# Altium PCB 遥控.PCBDOC (part 1 of 2)
Units mm, origin at the board's own origin, x right, y up, seen from the top; angles counter-clockwise.
Board outline 70.36 x 87.5 mm, 2 copper layers (Top Layer, Bottom Layer); 32 components, 37 nets, 115 pads, 57 vias.
Unrouted connection lines stored in the file: 5.
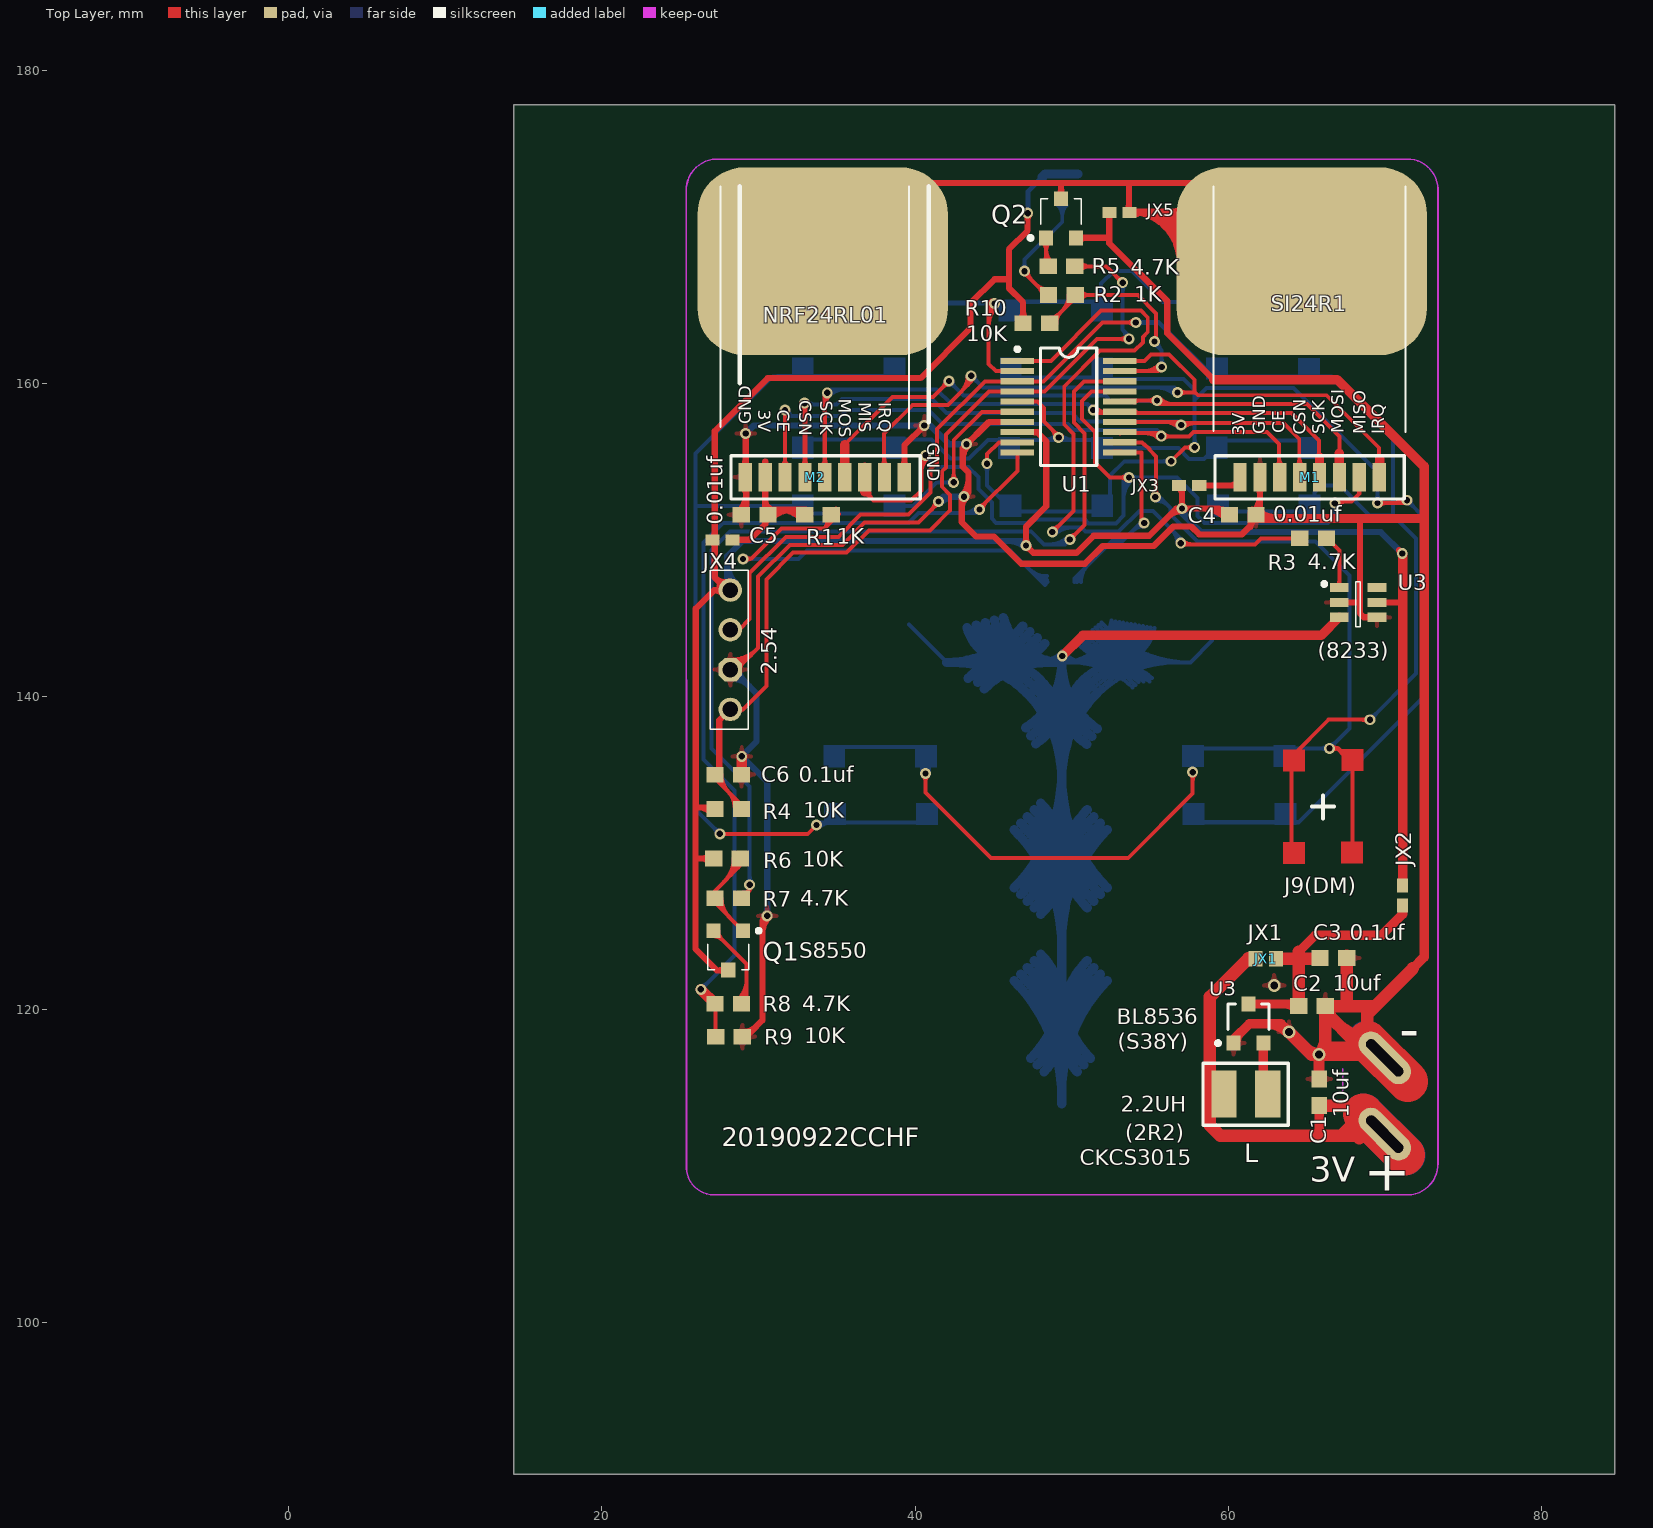
[diagram p0: Top Layer view]
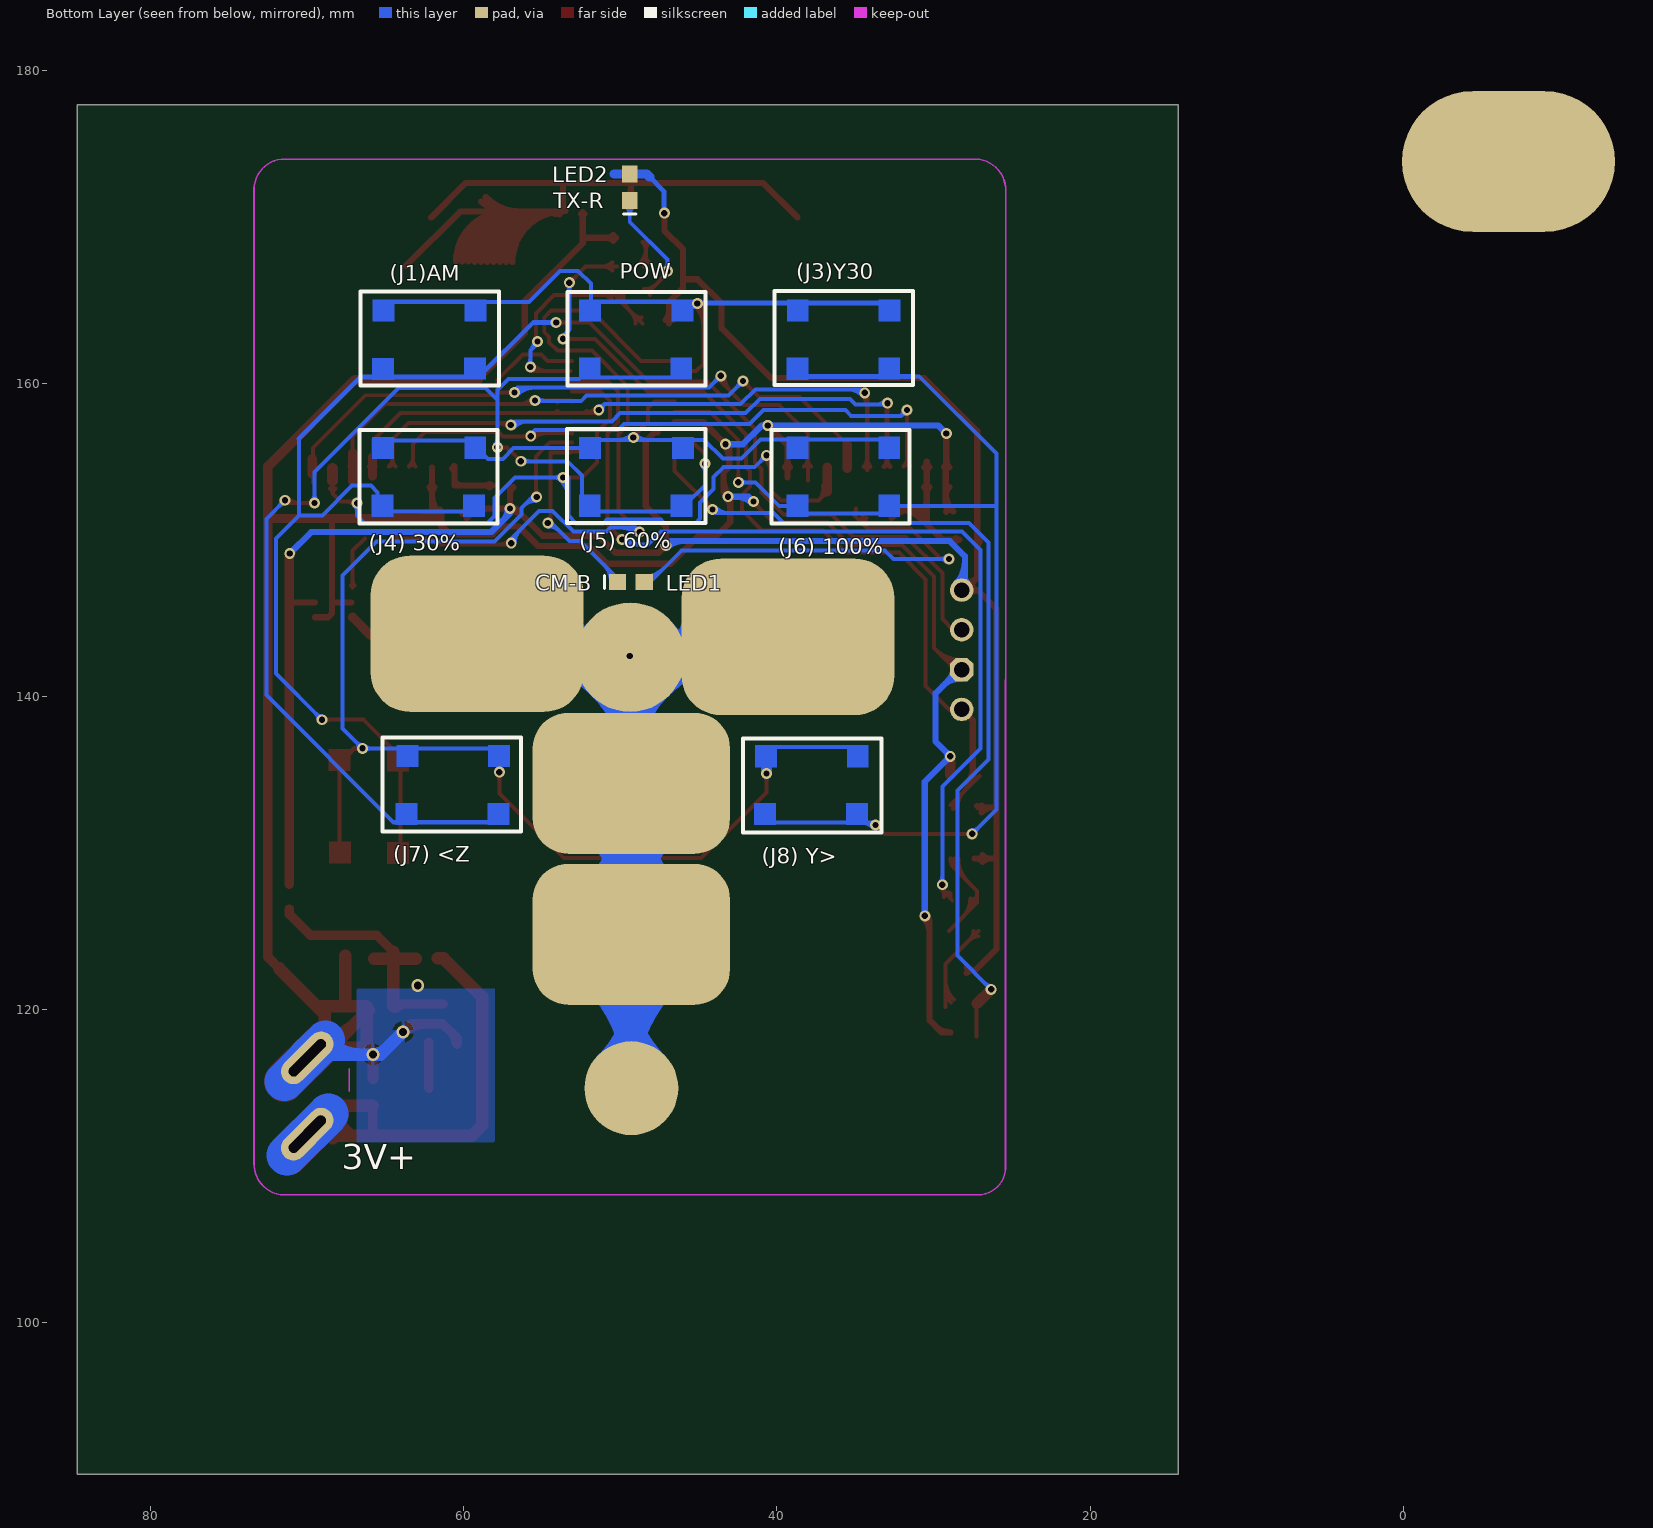
[diagram p1: Bottom Layer view, seen from below]

## Layer stack, top to bottom
Top Layer: signal copper 0.0356
Dielectric: dielectric 0.32, FR-4, Dk 4.8
Bottom Layer: signal copper 0.0356

## Board outline
19.304,90.297 84.709,90.297 84.709,177.8 14.351,177.8 14.351,90.297

## Design rules (kind name [scope] priority, off if disabled: settings)
Clearance [All] p1: gap=0.254
FabricationTestPointUsage TestPointUsage [All] p1: valid=0 allowmultiple=FALSE
FabricationTestpoint Testpoint [All] p1: side=3 testpointundercomponent=TRUE minsize=1.016 maxsize=2.54 preferedsize=1.524 minholesize=0 maxholesize=1.016 preferedholesize=0.813 testpointgrid=0.025 allowsidetop=TRUE allowsidebottom=TRUE usegrid=TRUE gridtolerance=0
PolygonConnect [All] p1: connectstyle=Relief reliefconductorwidth=0.254 reliefentries=4 polygonreliefangle="90 Angle"
RoutingVias [All] p1: holewidth=0.4 width=0.8 viastyle="Through Hole" minholewidth=0.4 minwidth=0.6 maxholewidth=1 maxwidth=1.5
SilkscreenOverComponentPads [All] p1: minsilkscreentomaskgap=0.254
SolderMaskExpansion [All] p1: expansion=0.102
Width Width_9 [InNet('3V3')] p1: maxlimit=1 minlimit=0.254 preferedwidth=0.6 toplayer_prefwidth=0.55 minimp=50.000000 maximp=50.000000 favimp=50.000000
Width Width_8 [InNet('3V+')] p2: maxlimit=3 minlimit=0.254 preferedwidth=0.8 toplayer_prefwidth=0.55 minimp=50.000000 maximp=50.000000 favimp=50.000000
Width Width_7 [InNet('L-3V')] p3: maxlimit=1 minlimit=0.254 preferedwidth=0.6 toplayer_prefwidth=0.55 minimp=50.000000 maximp=50.000000 favimp=50.000000
Width Width_6 [InNet('T-3V')] p4: maxlimit=1 minlimit=0.254 preferedwidth=0.6 toplayer_prefwidth=0.55 minimp=50.000000 maximp=50.000000 favimp=50.000000
Width Width_5 [InNet('3V')] p5: maxlimit=1 minlimit=0.254 preferedwidth=0.6 toplayer_prefwidth=0.39 minimp=50.000000 maximp=50.000000 favimp=50.000000
Width Width_4 [InNet('T-3V')] p6: maxlimit=1 minlimit=0.254 preferedwidth=0.6 toplayer_prefwidth=0.55 minimp=50.000000 maximp=50.000000 favimp=50.000000
Width Width_3 [InNet('D1-')] p7: maxlimit=1 minlimit=0.3 preferedwidth=0.8 toplayer_prefwidth=0.6 minimp=50.000000 maximp=50.000000 favimp=50.000000
Width Width_2 [InNet('GND')] p8: maxlimit=3 minlimit=0.254 preferedwidth=0.8 toplayer_prefwidth=0.39 minimp=50.000000 maximp=50.000000 favimp=50.000000
Width Width_1 [InNet('3V')] p9: maxlimit=1 minlimit=0.254 preferedwidth=0.6 toplayer_prefwidth=0.55 minimp=50.000000 maximp=50.000000 favimp=50.000000
Width [All] p10: maxlimit=2 minlimit=0.254 preferedwidth=2 bottomlayer_prefwidth=0.8 minimp=50.000000 maximp=50.000000 favimp=50.000000
25 further rules are at their usual default settings.

## Components (designator, comment, footprint, x,y, rotation, side; value= is the part's Value field where it differs from the comment)
2.54 "2.54HP" HDR1X4 28.2,139.167 r90 top (schematic designator SX)
(8233) "U3" SOT23-6_M 68.301,146 r0 top
C1 "10uf" CR1608-0603 65.811,114.706 r90 top
C2 "10uf" CR1608-0603 65.354,120.218 r180 top
C3 "0.1uf" CR1608-0603 66.726,123.292 r0 top
C4 "0.01uf" CR1608-0603 60.935,151.6 r180 top
C5 "0.01uf" CR1608-0603 29.75,151.6 r0 top
C6 "0.1uf" CR1608-0603 28.067,135 r0 top
JX1 "JX1" CR1005-0402#1 62.408,123.241 r0 top
JX2 "JX3" CR1005-0402#2 71.145,127.279 r270 top
JX3 "JX2" CR1005-0402#2 57.506,153.467 r0 top
JX4 "JX2" CR1005-0402#2 27.7,150 r0 top
JX5 "JX2" CR1005-0402#2 53.061,170.917 r180 top
L "2.2UH" L7 61.519,115.57 r180 top locked
LED1 "CM-B" CC1608-0603 49.327,147.3 r180 bottom
LED2 "TX-R" CC1608-0603 49.403,172.517 r90 bottom
M1 "SI24R1" MHDR1X8 69.65,154 r180 top locked
M2 "NRF24L01" MHDR1X8 38.049,154 r180 top locked
Q1 "S8550" SO-G3/C2.5 28.067,123.774 r180 top (schematic designator U5)
Q2 "S8550" SO-G3/C2.5 49.327,170.536 r0 top locked (schematic designator U5)
R1 "1K" CR1608-0603 33.8,151.6 r180 top
R2 "1K" CR1608-0603 49.378,165.633 r0 top
R3 "4.7K" CR1608-0603 65.43,150.089 r180 top
R4 "10K" CR1608-0603 28.067,132.8 r0 top
R5 "4.7K" CR1608-0603 49.352,167.462 r0 top
R6 "10K" CR1608-0603 27.991,129.642 r0 top
R7 "4.7K" CR1608-0603 28.067,127.102 r180 top
R8 "4.7K" CR1608-0603 28.067,120.371 r180 top
R9 "10K" CR1608-0603 28.118,118.262 r180 top
R10 "10K" CR1608-0603 47.752,163.83 r0 top
U1 "STM8L051F3P6" SSOP20 49.809,158.501 r270 top locked
U3 "BL8536" SO-G3/C2.5 61.3,119.1 r0 top

## Footprints (in the part's own frame and the unit in brackets; to place one, negate y for a bottom-side part, rotate by r counter-clockwise, add the part's x,y. Pads: shape width x height; smd on the part's side, far side on the other; paste and mask are expansions set on the pad)
CC1608-0603 [mm] "Chip Capacitor; Body 1.6 x 0.8 mm (LxW typ)"
  rect 1.1x1 smd: 1(-0.85,0) 2(0.85,0)
  silkscreen extent -1.7,-0.4 -1.7,0.4
CR1005-0402#1 [mm] "Chip Resistor; Body 1.1 x 0.5 mm (LxW typ)"
  rect 0.9x1 smd: 1(-0.65,0) 2(0.65,0)
CR1005-0402#2 [mm] "Chip Resistor; Body 1.1 x 0.5 mm (LxW typ)"
  rect 0.9x0.7 smd: 1(-0.65,0) 2(0.65,0)
CR1608-0603 [mm] "Chip Resistor; Body 1.6 x 0.8 mm (LxW typ)"
  rect 1.1x1 smd: 1(-0.85,0) 2(0.85,0)
HDR1X4 [mm]
  round 1.5 hole 1: 1(0,0) 3(5.08,0) 4(7.62,0)
  oct 1.5x1.5 hole 1: 2(2.54,0)
  silkscreen extent -1.27,-1.14 8.89,1.27
L7 [mm]
  rect 1.6x3 smd: 1(1.791,0.964) 2(-1.009,0.964)
  silkscreen extent -2.31,-1.01 3.12,2.96
MHDR1X8 [mm] "Connector; Header; 8 Position"
  rect 0.85x1.8 smd: 1(0,0) 2(1.27,0) 3(2.54,0) 4(3.81,0) 5(5.08,0) 6(6.35,0) 7(7.62,0) 8(8.89,0)
  silkscreen extent -1.6,-1.36 10.49,1.4
SO-G3/C2.5 [mm]
  rect 0.9x0.95 smd: 1(-0.95,-1.25) 2(0.95,-1.25) 3(0,1.25)
  silkscreen extent -2.08,-1.37 1.3,1.25
SOT23-6_M [mm]
  rect 1.2x0.59 smd: 1(-1.2,0.95) 2(-1.2,0) 3(-1.2,-0.95) 4(1.2,-0.95) 5(1.2,0) 6(1.2,0.95)
  silkscreen extent -2.29,-1.55 0.15,1.31
SSOP20 [mm] "SSOP, Plastic; 20 Leads; Body Width 5.3 mm; Pitch 0.65 mm"
  rect 0.39x2.15 smd: 1(-2.925,-3.275) 2(-2.275,-3.275) 3(-1.625,-3.275) 4(-0.975,-3.275) 5(-0.325,-3.275) 6(0.325,-3.275) 7(0.975,-3.275) 8(1.625,-3.275) 9(2.276,-3.275) 11(2.925,3.275) 13(1.625,3.275) 15(0.325,3.275) 16(-0.325,3.275) 17(-0.975,3.275) 18(-1.625,3.275) 19(-2.275,3.275) 20(-2.925,3.275)
  rect 0.395x2.15 smd: 10(2.925,-3.275) 12(2.276,3.275) 14(0.975,3.275)
  silkscreen extent -3.8,-3.4 3.75,1.8

## Part data
U1: library part ST6208CN6, "8-Bit ROM MCU with A/D Converter, Two Timers, Oscillator Safeguard and Safe Reset, 20-Pin SSOP, Industrial"

## Free pads (board coordinates)
  oval 13.6x9 smd far side: 0(-6.73,174.166)
  rrect50% 16x12 smd: 0(34.1,167.792) 0(64.703,167.792)
  rrect50% 13.6x10 smd far side: 0(39.3,143.8) 0(59.15,144)
  rect 0.85x1.8 smd: 0(39.319,154)
  round 6 smd far side: 0(49.3,114.97)
  rrect50% 12.6x9 smd far side: 0(49.3,124.8) 0(49.3,134.442)
  round 7 smd far side: 0(49.378,142.5)
  oval 4.1x1.6 hole 0.65 slot 3.1 at 135 deg rot 135: 1(70,112.038) 1(70,116.91)

## Via types
v1: diameter 0.7, hole 0.4, Top Layer to Bottom Layer, 54 vias
v2: diameter 0.82, hole 0.5, Top Layer to Bottom Layer, 3 vias

## Nets (pads, with @x,y where several pads share a name; then routed paths per layer and width w, separated by ;. In a path a pad name is that pad's centre, name@x,y a point inside that pad or via, vN(x,y) a via of type N, cw(c..) or ccw(c..) an arc to the next point about the centre after c; other vN are vias at no path point)
3.3V: 
3V: 2.54.4 (8233).5 C2.2 C3.1 C4.2 C5.2 JX1.2 JX2.1 JX2.2 JX3.1 JX3.2 JX4.1 JX4.2 LED2.2 M1.8 M2.7 Q1.3 R1.2 R4.1 R6.1 R10.1 U1.8 U3.3 | length 224.1
  Top Layer w0.36: v1(47.092,149.631) v1@47.092,149.962
  Top Layer w0.38: 25.984,134.321 25.984,123.85 27.333,122.502 Q1.3@27.739,122.502 ; 25.997,133.135 25.997,132.934 26.031,132.9 27.117,132.9 R4.1@27.217,133 ; 26.177,132.9 cw(c26.177,131.81) R4.1@26.948,132.581 ; 26.199,129.642 R6.1@27.381,129.642 ; 26.66,132.9 ccw(c26.66,133.307) R4.1@26.948,133.019 ; R6.1@26.872,129.422 ccw(c26.342,128.893) 26.342,129.642 ccw(c26.342,130.39) R6.1@26.872,129.861 ; R6.1@27.09,129.591 R6.1@27.141,129.642 ; 27.434,122.502 cw(c27.434,121.866) Q1.3@27.883,122.315 ; 27.445,122.502 ccw(c27.445,123.121) Q1.3@27.883,122.683
  Top Layer w0.39: JX4.1@27.04,149.89 cw(c26.647,149.497) 27.203,149.497 ; JX4.1@27.04,150.11 ccw(c26.647,150.503) 27.203,150.503 ; 27.394,147.393 cw(c26.788,146.787) 2.54.4@27.645,146.787 ; 2.54.4@27.517,147.058 2.54.4@27.789,146.787 ; 2.54.4@28,146.787 27.203,147.583 ; 2.54.4@28.079,147.328 cw(c27.873,148.253) 27.203,147.583 ; C5.2@30.59,151.66 cw(c31.211,151.039) 31.211,151.917 ; C5.2@30.67,152.07 30.822,151.917 R1.2@33.045,151.917 ; C5.2@30.866,151.384 cw(c32.153,150.097) 32.153,151.917 ; 31.397,151.917 cw(c31.397,150.097) R1.2@32.684,151.384 ; 32.339,151.917 cw(c32.339,151.039) R1.2@32.96,151.66 ; 45.085,166.649 43.536,165.1 43.536,163.5 40.361,160.325 30.582,160.325 27.203,156.947 27.203,147.583 ; 45.999,166.065 45.999,168.554 47.193,169.748 v1(47.193,170.866) ; v1@47.084,170.756 cw(c46.819,170.492) 47.193,170.492 cw(c47.567,170.492) v1@47.303,170.756 ; JX3.1@56.846,153.357 cw(c56.357,152.869) 57.048,152.869 ; v1@56.935,151.888 ccw(c56.693,151.663) 56.693,151.994 ; v1@56.935,152.099 cw(c56.693,152.324) 56.693,151.994 ; v1@56.939,152.103 ccw(c56.674,152.368) 57.048,152.368 ccw(c57.423,152.368) 57.158,152.103 ccw(c57.423,152.368) 57.423,151.994 ccw(c57.423,151.619) v1@57.158,151.884 ; v1@57.048,151.968 JX3.1@57.048,153.441 ; JX3.2@58.156,153.467 60.604,153.467 60.604,154.406 M1.8@60.61,154.411 ; 58.348,151.994 cw(c58.348,149.913) C4.2@59.819,151.384 ; JX3.2@58.365,153.357 cw(c58.63,153.093) 58.63,153.467 cw(c58.63,153.841) JX3.2@58.365,153.576 ; 59.29,151.994 cw(c59.29,150.855) C4.2@60.095,151.66 ; C4.2@59.729,151.663 59.399,151.994 ; C4.2@59.923,151.884 cw(c59.745,152.34) 59.399,151.994 ; 60.064,153.467 ccw(c60.064,154.221) M1.8@60.597,153.688 ; M1.8@60.61,154.711 M1.8@60.61,154.411 ; M1.8@60.76,154.561 M1.8@60.61,154.411 ; 56.693,151.994 59.399,151.994
  Top Layer w0.4: 25.997,133.135 25.997,145.606 27.178,146.787 ; 2.54.4@27.741,146.484 ccw(c27.178,146.112) 27.178,146.787 ; 2.54.4@27.741,147.09 cw(c27.178,147.461) 27.178,146.787 ; 2.54.4@27.789,146.787 27.178,146.787 ; JX4.2@28.35,150 29.426,150 30.429,151.003 30.429,155 ; JX4.2@28.556,149.894 cw(c28.812,149.638) 28.812,150 cw(c28.812,150.362) JX4.2@28.556,150.106 ; M2.7@30.27,153.366 cw(c29.886,152.982) 30.429,152.982 cw(c30.972,152.982) M2.7@30.588,153.366 ; M2.7@30.274,154.638 ccw(c29.929,155) 30.429,155 ; 30.429,150.991 cw(c30.78,150.991) C5.2@30.656,151.319 ; 30.429,152.616 ccw(c31.566,152.616) C5.2@30.762,151.812 ; M2.7@30.584,154.638 cw(c30.929,155) 30.429,155 ; 45.085,166.649 45.999,166.649 ; 45.999,166.065 46.902,165.163 R10.1@46.902,163.83 ; R10.1@46.69,164.042 ccw(c46.178,164.554) 46.902,164.554 ccw(c47.626,164.554) R10.1@47.114,164.042 ; v1@46.986,149.737 ccw(c46.729,149.994) 47.092,149.994 ccw(c47.454,149.994) v1@47.198,149.737 ; v1@47.092,149.481 cw(c47.092,149.119) 47.348,149.375 cw(c47.604,149.631) v1@47.242,149.631 ; v1(47.092,149.631) 47.549,149.174 50.317,149.174 51.403,150.26 54.959,150.26 56.693,151.994 ; v1@47.092,149.962 47.092,150.851 48.387,152.146 48.387,156.286 47.799,156.874 47.638,156.874 ; 56.185,151.486 cw(c57.048,150.623) v1@57.048,151.844 ; 69.501,146 70.917,146 ; v1@70.917,149.327 v1@71.145,149.098
  Top Layer w0.6: U3.3@61.3,120.35 C2.2@64.469,120.35 ; 63.653,120.35 cw(c63.653,119.417) C2.2@64.313,120.077 ; 64.504,123.686 65.557,124.739 69.799,124.739 71.145,126.086 JX2.2@71.145,126.416 ; JX2.1@71.145,127.991 v1@71.145,149.098
  Top Layer w0.8: JX1.2@63.058,123.241 C3.1@65.723,123.241 ; C2.2@64.504,120.218 64.504,123.686
  Bottom Layer w0.3: v1@47.052,171.007 ccw(c46.649,171.41) 47.219,171.41 ; v1@47.219,170.866 47.219,172.263 48.133,173.177 ; 47.219,171.287 ccw(c47.615,171.287) v1@47.335,171.007
  Bottom Layer w0.38: 2.54.4@27.711,146.787 2.54.4@28,147.075
  Bottom Layer w0.39: 2.54.4@27.808,147.179 ccw(c27.343,147.644) 28,147.644 ; 2.54.4@28,147.075 28,148.955 28.956,149.911 46.812,149.911 v1(47.092,149.631) ; 28,147.668 ccw(c29.081,147.668) 2.54.4@28.317,146.903 ; 28,148.609 ccw(c30.023,148.609) 2.54.4@28.592,147.179 ; 46.043,149.911 cw(c46.043,148.583) v1@46.982,149.522
  Bottom Layer w0.4: v1(57.048,151.994) 57.048,151.7 57.687,151.062 58.25,150.498 58.544,150.498 58.547,150.495 69.748,150.495 v1(71.12,149.123) ; v1@57.198,151.994 ccw(c58.27,151.994) 57.512,151.236 ; v1@70.97,149.123 ccw(c70.608,149.123) 70.864,149.379 ccw(c71.12,149.636) v1@71.12,149.273
  Bottom Layer w0.6: 48.133,173.177 48.323,173.367 50.394,173.367
3V+: C1.1 JX1.1 L.1 pad.1@70,112.038 | length 55.3
  Top Layer w0.254: 66.624,111.941 66.65,111.967
  Top Layer w0.6: 65.811,112.017 C1.1@65.811,113.856 ; pad.1@68.631,113.335 pad.1@69.571,112.395
  Top Layer w0.8: JX1.1@61.671,123.266 61.29,123.266 58.826,120.802 58.826,112.598 59.483,111.941 66.624,111.941 67.237,111.941 ; C1.1@65.811,113.856 68.109,113.856 68.378,113.587 ; 68.31,113.656 ccw(c69.116,114.462) pad.1@69.116,113.322 ; 68.326,111.941 ccw(c68.326,113.169) pad.1@69.498,112.802 ; 68.378,111.77 cw(c69.13,111.77) pad.1@69.121,112.522 ; 68.378,112.58 cw(c69.12,112.58) pad.1@69.111,113.322 ; pad.1@68.631,113.335 pad.1@68.378,113.082 ; pad.1@68.734,113.041 cw(c67.237,113.51) 67.237,111.941 ; pad.1@69.052,112.527 ccw(c68.716,110.462) 67.237,111.941 ; pad.1@69.089,113.321 cw(c69.027,114.235) 68.378,113.587 ; pad.1@69.415,111.941 ccw(c69.415,112.828) pad.1@70.261,112.563 ; pad.1@69.571,112.395 pad.1@69.213,112.038 ; 67.237,111.941 69.903,111.941 pad.1@70,112.038 ; 67.237,111.941 pad.1@68.378,113.082 ; pad.1@68.378,113.082 68.378,112.038 pad.1@69.213,112.038 ; pad.1@68.378,113.082 68.378,113.587 ; pad.1@69.213,112.038 69.178,112.002 pad.1@70,112.038 ; pad.1@69.213,112.038 69.928,112.038 pad.1@70,112.038 ; 68.484,113.481 cw(c67.925,112.922) 68.716,112.922 ccw(c67.925,112.922) 68.484,113.481
  Top Layer w2.6: pad.1@68.631,113.335 pad.1@71.26,110.706
  Bottom Layer w2.6: pad.1@68.658,113.333 pad.1@71.298,110.693
3V-: Q1.2 R8.1 | length 9.4
  Top Layer w0.254: Q1.2@27.117,124.676 cw(c27.117,123.836) 27.711,124.43 ; Q1.2@27.117,125.024 29.235,122.906 R8.1@29.235,120.142 ; Q1.2@27.44,124.999 ccw(c28.159,124.999) 27.651,124.49 ; R8.1@28.703,120.634 ccw(c27.418,121.919) 29.235,121.919 ; R8.1@28.883,120.455 ccw(c28.032,121.306) 29.235,121.306
AHLB: 
BAT-KZ: R7.1 U1.18 | length 66.2
  Top Layer w0.254: R7.1@28.804,126.975 29.439,127.61 ; R7.1@28.917,127.102 R7.1@28.917,127.393 ; R7.1@29.021,127.471 ccw(c29.091,127.957) 29.439,127.61 ; R7.1@29.328,127.197 cw(c29.741,127.307) 29.439,127.61 ; v1@29.341,127.764 cw(c29.267,127.61) 29.439,127.61 ; v1(29.439,127.965) 29.439,127.61 ; v1@29.536,127.764 ccw(c29.611,127.61) 29.439,127.61 ; v1(49.886,150.012) 50.825,150.952 50.825,156.794 50.14,157.48 50.14,159.487 50.779,160.126 U1.18@53.217,160.126 ; v1@49.886,150.235 ccw(c49.886,150.774) 50.266,150.393 ccw(c50.647,150.012) v1@50.109,150.012
  Bottom Layer w0.254: v1@29.281,128.123 ccw(c28.9,128.504) 29.439,128.504 ccw(c29.977,128.504) v1@29.596,128.123 ; v1(29.439,127.965) 29.439,134.239 27,136.677 27,149.352 28.169,150.52 47.422,150.52 48.235,149.708 49.581,149.708 v1(49.886,150.012) ; 48.611,149.708 ccw(c48.611,151.287) v1@49.728,150.17 ; 49.225,149.708 ccw(c49.225,150.673) v1@49.908,149.99
BAT_ADC: R8.2 R9.2 U1.10 | length 60.1
  Top Layer w0.254: R9.2@27.268,118.262 R8.2@27.268,120.382 ; v1@44.094,151.968 46.534,154.408 U1.10@46.534,155.576 ; v1@44.12,152.166 ccw(c44.12,152.582) 44.414,152.288 ; v1@44.343,151.943 cw(c45.004,151.943) 44.536,152.41
  Top Layer w0.7: v1(26.314,121.285) R8.2@27.217,120.382
  Bottom Layer w0.254: v1(26.314,121.285) 28.473,123.444 28.473,133.977 26.492,135.958 26.492,149.835 27.737,151.079 39.573,151.079 40.208,151.714 43.891,151.714 v1(44.12,151.943) ; v1@26.314,121.508 ccw(c26.314,122.046) 26.695,121.666 ccw(c27.076,121.285) v1@26.537,121.285 ; 43.03,151.714 ccw(c43.03,153.033) v1@43.962,152.1 ; 43.643,151.714 ccw(c43.643,152.42) v1@44.142,151.921
CE: M1.6 M2.6 U1.13 | length 47.7
  Top Layer w0.254: M2.6@31.488,154.686 ccw(c30.98,155.194) 31.699,155.194 ccw(c32.419,155.194) M2.6@31.91,154.686 ; M2.6@31.546,154.731 ccw(c31.386,155) 31.699,155 ; v1(31.699,158.293) 31.699,155 ; M2.6@31.852,154.731 cw(c32.013,155) 31.699,155 ; U1.13@53.081,156.804 53.096,156.82 55.524,156.82 55.753,156.591 57.513,156.591 57.798,156.876 62.478,156.876 63.246,156.108 63.246,154.965 ; U1.13@54.012,156.924 ccw(c54.265,157.176) 54.265,156.82 ; 54.699,156.82 cw(c54.699,155.587) v1@55.57,156.459 ; 55.312,156.82 cw(c55.312,156.201) v1@55.75,156.638 ; v1@55.885,156.459 cw(c56.205,156.139) 56.205,156.591 ; v1@55.885,156.774 ccw(c56.327,157.216) 56.327,156.591 ; M1.6@63.089,154.686 ccw(c62.711,155.064) 63.246,155.064 ; M1.6@63.12,154.713 ccw(c62.929,154.965) 63.246,154.965 ; 63.246,155.325 ccw(c64.15,155.325) M1.6@63.511,154.686 ; M1.6@63.395,154.757 cw(c63.466,154.965) 63.246,154.965 ; M1.6@63.5,154.711 63.246,154.965
  Bottom Layer w0.254: v1@31.699,158.07 cw(c31.699,157.531) 32.08,157.912 ; v1(31.699,158.293) 32.08,157.912 ; v1@31.922,158.293 ccw(c32.461,158.293) 32.08,157.912 ; v1@55.519,156.695 ccw(c55.23,156.804) 55.448,157.023 ; v1@55.728,156.743 55.448,157.023 ; 32.08,157.912 35.255,157.912 35.636,158.293 40.869,158.293 41.758,157.404 49.784,157.404 50.165,157.023 55.448,157.023
  other v1: 55.728,156.616
CMOUT: (8233).1 R3.1 R3.2 U1.1 | length 55
  Top Layer w0.254: U1.1@46.534,161.426 48.675,161.426 51.892,164.643 54.432,164.643 54.864,164.211 54.864,163.264 54.565,162.964 54.565,162.616 54.026,162.077 51.816,162.077 49.53,159.791 49.53,157.353 50.114,156.769 50.114,151.841 v1(48.768,150.495) ; v1@48.768,150.718 ccw(c48.768,151.256) 49.149,150.876 ccw(c49.529,150.495) v1@48.991,150.495 ; v1@56.972,149.911 57.175,149.708 61.722,149.708 62.103,150.089 R3.2@64.58,150.089 ; v1@57.13,149.626 cw(c57.327,149.429) 57.327,149.708 ; v1@57.13,149.941 ccw(c57.695,150.506) 57.695,149.708 ; R3.2@64.248,150.277 R3.2@64.436,150.089 ; R3.1@66.319,150.089 67.101,149.307 67.101,146.95 ; 66.982,147.069 ccw(c66.695,147.356) 67.101,147.356 ccw(c67.506,147.356) 67.219,147.069
  Bottom Layer w0.254: v1@48.746,150.517 cw(c49.368,149.895) 49.368,150.774 ; v1(48.768,150.495) 49.047,150.774 50.622,150.774 50.876,150.52 53.01,150.52 54.331,151.841 55.194,151.841 56.963,150.073 v1@56.963,149.774 ; v1@48.926,150.337 cw(c49.981,149.282) 49.981,150.774 ; 56.394,150.641 cw(c55.536,149.784) v1@56.749,149.784 ; 56.828,150.208 cw(c56.404,149.784) v1@57.003,149.784
  other v1: 56.972,149.784
CSN: M1.5 M2.5 U1.14 | length 51.1
  Top Layer w0.254: U1.14@53.084,157.526 56.799,157.526 v1(56.998,157.328) ; 55.981,157.526 cw(c55.981,156.311) v1@56.84,157.17 ; 56.594,157.526 cw(c56.594,156.924) v1@57.02,157.35 ; v1@56.998,157.452 63.528,157.452 64.541,156.439 64.541,154.864 64.694,154.711 64.57,155 ; v1@57.155,157.17 cw(c57.836,156.489) 57.836,157.452 ; M1.5@64.359,154.686 ccw(c63.92,155.125) 64.541,155.125 ; 64.541,155.263 ccw(c65.358,155.263) M1.5@64.781,154.686
  Top Layer w0.3: M2.5@32.775,154.669 ccw(c32.305,155.139) 32.969,155.139 ccw(c33.633,155.139) M2.5@33.164,154.669 ; v1@32.802,158.583 cw(c32.4,158.18) 32.969,158.18 ; M2.5@32.813,154.701 ccw(c32.606,155) 32.969,155 ; v1(32.944,158.725) 32.969,158.699 32.969,155 ; 32.969,158.303 cw(c33.365,158.303) v1@33.085,158.583 ; M2.5@33.126,154.701 cw(c33.333,155) 32.969,155
  Bottom Layer w0.254: v1(32.944,158.725) 32.868,158.648 34.976,158.648 35.331,159.004 41.097,159.004 42.012,158.09 50.013,158.09 50.546,157.556 56.769,157.556 v1(56.998,157.328) ; v1@33.101,158.567 cw(c33.298,158.37) 33.298,158.648 ; v1@33.101,158.882 ccw(c33.666,159.447) 33.666,158.648 ; 55.907,157.556 cw(c55.907,156.237) v1@56.84,157.17 ; 56.521,157.556 cw(c56.521,156.851) v1@57.02,157.35
GND: 2.54.2 (8233).2 (8233).4 C1.2 C2.1 C3.2 C4.1 C5.1 C6.2 JX5.2 M1.7 M2.8 pad.0@39.319,154 pad.1@70,116.91 Q2.2 R9.1 U1.7 U3.1 | length 297.9
  Top Layer w0.254: 2.54.2@28.2,141.822 ccw(c28.2,143.066) 29.08,142.186 ; 2.54.2@28.2,142.076 ccw(c28.2,143.933) 29.513,142.62 ; 2.54.2@28.2,142.33 ccw(c28.2,144.8) 29.947,143.053 ; 2.54.2@28.6,141.707 29.972,143.078 29.972,147.65 32.004,149.682 35.357,149.682 36.779,151.105 40.234,151.105 v1@41.377,152.248 ; 2.54.2@28.823,141.707 cw(c29.36,141.707) 28.98,142.087 ; 41.069,151.94 ccw(c40.558,152.451) v1@41.281,152.451 ; 41.253,152.124 cw(c41.504,151.873) v1@41.504,152.228
  Top Layer w0.4: 2.54.2@27.711,141.707 2.54.2@28.6,141.707 ; C5.1@28.738,151.812 ccw(c27.598,152.952) 29.21,152.952 ; C5.1@28.9,151.9 29.21,152.21 ; R9.1@28.917,118.528 29.476,118.528 30.251,119.304 30.251,125.679 v1(30.556,125.984) ; C5.1@28.924,151.899 ccw(c28.898,152.21) 29.21,152.21 ; M2.8@29,153.366 cw(c28.493,152.859) 29.21,152.859 ; M2.8@29,154.634 ccw(c28.555,155.08) 29.185,155.08 ; M2.8@29.011,154.645 ccw(c28.68,155.025) 29.185,155.025 ; R9.1@29.018,118.562 ccw(c29.018,119.751) 29.858,118.91 ; v1@29.079,156.688 cw(c28.822,156.432) 29.185,156.432 cw(c29.547,156.432) v1@29.291,156.688 ; 29.159,155 29.185,155.025 ; v1(29.185,156.794) 29.185,155.025 ; C5.1@29.185,151.786 cw(c29.436,151.984) 29.21,152.21 ; M2.8@29.21,154.508 29.21,152.21 ; 30.251,124.886 cw(c31.654,124.886) v1@30.662,125.878 ; v1@30.406,125.984 cw(c30.044,125.984) 30.3,125.728 cw(c30.556,125.472) v1@30.556,125.834 ; pad.0@39.16,154.634 ccw(c38.776,155.018) 39.319,155.018 ccw(c39.862,155.018) pad.0@39.478,154.634 ; pad.0@39.319,153.975 39.319,156.032 v1@40.615,157.328 ; v1@40.439,157.302 cw(c40.077,157.302) 40.333,157.046 cw(c40.589,156.79) v1@40.589,157.152 ; 42.977,152.026 cw(c43.859,152.026) v1@43.235,152.65 ; v1@43.023,152.862 ccw(c42.093,153.792) 43.409,153.792 ; 43.053,155.194 cw(c44.196,155.194) v1@43.388,156.002 ; v1@43.129,152.906 ccw(c43.129,153.268) 43.385,153.012 ccw(c43.641,152.756) v1@43.279,152.756 ; v1@43.282,156.258 ccw(c43.282,156.682) 43.581,156.382 ; U1.7@46.534,157.526 44.725,157.526 43.053,155.854 43.053,154.661 43.409,154.305 43.409,153.035 42.977,152.603 42.977,151.13 43.891,150.216 45.034,150.216 46.787,148.463 50.851,148.463 51.994,149.606 55.245,149.606 56.49,150.851 57.633,150.851 58.141,150.343 60.884,150.343 61.429,150.888 C4.1@61.429,151.663 ; Q2.2@50.277,169.286 52.405,169.286 52.411,169.291 ; Q2.2@50.454,169.109 cw(c50.88,168.682) 50.88,169.286 cw(c50.88,169.889) Q2.2@50.454,169.462 ; JX5.2@52.305,170.811 cw(c52.048,170.554) 52.411,170.554 cw(c52.773,170.554) JX5.2@52.517,170.811 ; JX5.2@52.411,170.917 52.411,169.291 ; 59.08,160.223 56.109,163.195 56.109,165.252 52.411,168.95 52.411,169.291 ; 61.429,150.825 cw(c61.928,150.825) C4.1@61.807,151.309 ; C4.1@61.519,151.917 C4.1@61.849,151.587 ; C4.1@61.62,151.359 62.03,151.768 M1.7@62.03,154.61 ; C4.1@61.622,151.812 ccw(c60.639,152.796) 62.03,152.796 ; M1.7@61.871,153.366 cw(c61.487,152.982) 62.03,152.982 cw(c62.573,152.982) M1.7@62.189,153.366 ; 67.189,145.999 68.351,145.999 ; 68.415,151.359 68.415,145.304 68.669,145.05 69.501,145.05 ; pad.1@69.127,117.766 69.545,117.348 pad.1@70,116.91 ; 29.185,154.957 ccw(c29.641,154.957) 29.318,154.634 cw(c29.641,154.957) 29.185,154.957
  Top Layer w0.6: 59.08,160.223 66.98,160.223 72.517,154.686 72.517,123.342 71.806,122.631 ; U3.1@60.411,117.789 60.411,118.145 61.341,119.075 63.398,119.075 v2@63.856,118.618 ; U3.1@60.5,117.875 cw(c61.367,117.875) 60.754,118.488 ; C4.1@61.62,151.359 72.517,151.359 ; C4.1@61.976,151.741 ccw(c62.9,152.666) 62.9,151.359 ; 62.389,119.075 cw(c62.389,117.075) v2@63.803,118.489
  Top Layer w0.7: C6.2@28.931,135 v1(28.931,136.169) ; C1.2@65.811,115.556 v2(65.811,117.119)
  Top Layer w0.8: v2(63.881,118.567) 65.329,117.119 v2(65.811,117.119) ; 64.97,117.478 ccw(c65.811,118.319) v2@65.811,117.129 ; v2@65.804,117.126 ccw(c64.839,118.092) 66.204,118.092 ; C2.1@66.091,119.939 C2.1@66.204,119.825 ; C2.1@66.354,120.218 ccw(c67.665,120.218) 66.738,119.292 ; 66.522,117.119 ccw(c66.522,120.388) 68.833,118.077 cw(c67.591,119.319) 67.591,117.562 ; 66.524,117.562 68.897,117.562 68.455,117.119 ; 66.93,119.099 ccw(c69.116,121.285) pad.1@69.116,118.194 ; 67.576,120.269 C3.2@67.576,123.444 ; 68.296,117.734 ccw(c69.116,118.554) 69.116,117.394 ccw(c69.116,116.46) 68.456,117.12 ; 68.453,117.119 ccw(c68.453,118.457) pad.1@69.399,117.511 ; pad.1@68.716,117.781 cw(c67.822,117.752) 68.455,117.119 ; pad.1@68.796,118.033 cw(c68.263,118.43) 68.263,117.766 ; pad.1@68.823,117.522 ccw(c68.263,117.004) 68.263,117.766 ; pad.1@68.897,117.97 68.897,119.723 71.806,122.631 ; 68.897,119.287 ccw(c70.61,119.287) pad.1@69.399,118.077 ; pad.1@69.127,117.766 69.102,117.766 68.263,117.766 ; 69.336,120.218 C2.1@66.204,120.218 C2.1@66.204,119.825 ; v2(65.811,117.119) 66.204,117.512 C2.1@66.204,119.825 ; v2(65.811,117.119) 68.455,117.119 ; C2.1@66.204,119.825 68.263,117.766
  Top Layer w2.6: pad.1@68.897,117.97 69.102,117.766 71.476,115.392
  Bottom Layer w0.4: 2.54.2@27.991,141.707 28.372,141.707 29.87,140.208 29.87,137.109 v1(28.931,136.169) 30.556,134.544 v1(30.556,125.984) ; 2.54.2@28.2,141.157 cw(c28.2,139.414) 29.432,140.646 ; 2.54.2@28.75,141.707 ccw(c29.663,141.707) 29.018,141.061 ; v1@28.931,136.019 cw(c28.931,135.657) 29.187,135.913 cw(c29.443,136.169) 29.081,136.169 cw(c29.443,136.169) 29.187,136.425 cw(c28.931,136.682) v1@28.931,136.319 ; v1(29.185,156.794) 29.693,157.302 v1(40.589,157.302) 40.979,157.302 42.173,156.108 v1(43.282,156.108) ; v1@29.185,156.944 ccw(c29.185,157.306) 29.441,157.05 ccw(c29.697,156.794) v1@29.335,156.794 ; v1@30.45,126.09 ccw(c30.194,126.346) 30.556,126.346 ccw(c30.918,126.346) v1@30.662,126.09 ; v1@40.483,157.196 ccw(c40.227,156.94) 40.227,157.302 ccw(c40.227,157.664) v1@40.483,157.408 ; v1@40.695,157.196 cw(c40.951,156.94) 40.951,157.302 cw(c40.951,157.664) v1@40.695,157.408 ; v1@41.504,152.324 v1(41.504,152.451) 41.808,152.756 v1(43.129,152.756) ; v1@41.61,152.345 cw(c42.602,151.353) 42.602,152.756 ; v1@43.023,152.65 ccw(c42.767,152.393) 42.767,152.756 ccw(c42.767,153.118) v1@43.023,152.862 ; v1@43.176,156.002 ccw(c42.919,155.746) 42.919,156.108 ccw(c42.919,156.471) v1@43.176,156.214 ; 68.683,116.994 68.683,117.119 68.683,118.21 pad.1@70,116.91
  Bottom Layer w0.8: v2(63.881,118.567) 65.329,117.119 v2(65.811,117.119) 68.683,117.119 69.748,117.119 69.791,117.119 pad.1@70,116.91 ; 64.97,117.478 ccw(c65.811,118.319) v2@65.811,117.129 ; 66.522,117.119 ccw(c66.522,120.388) pad.1@68.833,118.077 ; 68.453,117.119 ccw(c68.453,118.457) pad.1@69.399,117.511
  Bottom Layer w2.5: pad.1@70,116.91 68.836,118.032 69.748,117.119 71.476,115.392
  other v2: 62.941,121.539
GND2: JX5.1 pad.0@34.1,167.792 pad.0@64.703,167.792 Q2.3 | length 97
  Top Layer w0.4: pad.0@38.684,170.586 40.894,172.796 59.868,172.796 pad.0@62.078,170.586 ; Q2.3@49.15,171.987 ccw(c48.723,172.414) 49.327,172.414 ccw(c49.93,172.414) Q2.3@49.504,171.987 ; Q2.3@49.327,171.626 49.327,172.72 ; JX5.1@53.505,171.023 ccw(c53.13,171.398) 53.66,171.398 ; 53.66,172.796 JX5.1@53.66,170.967 ; JX5.1@53.886,170.787 cw(c54.084,170.443) 54.187,170.826 ; JX5.1@53.893,170.791 cw(c54.282,170.203) 54.423,170.894 ; JX5.1@53.917,170.811 cw(c54.295,170.432) 54.295,170.967 ; JX5.1@54.063,170.967 cw(c54.063,167.727) pad.0@57.303,167.752 ; 54.466,170.967 cw(c54.466,167.73) pad.0@57.703,167.755 ; 54.869,170.967 cw(c54.869,167.733) pad.0@58.103,167.758 ; 55.272,170.967 cw(c55.272,167.736) pad.0@58.503,167.761 ; 55.675,170.967 cw(c55.675,167.739) pad.0@58.903,167.764 ; 56.078,170.967 cw(c56.078,167.742) pad.0@59.303,167.767 ; 56.366,170.967 ccw(c56.366,174.13) pad.0@58.602,171.894 ; 56.481,170.967 cw(c56.481,167.745) pad.0@59.703,167.77 ; pad.0@56.884,170.967 cw(c56.884,167.749) pad.0@60.103,167.773 ; pad.0@56.903,167.749 ccw(c53.66,167.724) JX5.1@53.66,170.967 ; pad.0@57.287,170.967 cw(c57.287,167.752) pad.0@60.503,167.776 ; pad.0@57.331,170.967 ccw(c57.331,173.164) pad.0@58.885,171.611 ; pad.0@63.703,167.5 60.236,170.967 JX5.1@53.66,170.967
HWKZ: 
HWPOW: 
IRQ: M1.1 M2.1 U1.20 | length 56.9
  Top Layer w0.254: M2.1@37.838,154.686 ccw(c37.391,155.133) 38.024,155.133 ; M2.1@38.024,153.772 38.024,156.794 39.853,158.623 42.113,158.623 43.586,160.096 ; 38.024,155.256 ccw(c38.83,155.256) M2.1@38.26,154.686 ; 42.936,159.446 ccw(c41.905,160.477) v1@43.363,160.477 ; 43.37,159.88 ccw(c42.772,160.477) v1@43.617,160.477 ; v1@43.477,160.283 cw(c43.372,160.096) 43.586,160.096 ; v1(43.586,160.477) 43.586,160.096 ; v1@43.696,160.283 ccw(c43.8,160.096) 43.586,160.096 ; U1.20@53.084,161.426 54.644,161.426 55.067,161.849 56.236,161.849 57.861,160.223 57.861,159.436 58.064,159.233 ; v1(56.769,159.41) 57.887,159.41 58.064,159.233 ; v1@56.927,159.253 cw(c57.307,158.872) 57.307,159.41 cw(c57.307,159.949) v1@56.927,159.568 ; M1.1@69.439,154.686 ccw(c68.938,155.187) 69.647,155.187 ; M1.1@69.469,154.864 M1.1@69.621,154.711 ; M1.1@69.647,153.67 69.647,155.88 66.294,159.233 58.064,159.233 ; 69.647,155.202 ccw(c70.377,155.202) M1.1@69.861,154.686
  Top Layer w0.6: M1.1@69.672,154.203 69.672,155.169
  Bottom Layer w0.254: v1@43.586,160.254 cw(c43.586,159.716) 43.967,160.097 cw(c44.348,160.477) v1@43.809,160.477 ; v1(43.586,160.477) 44.348,159.715 56.566,159.715 56.566,159.385 v1@56.769,159.588 ; 55.495,159.715 cw(c55.495,158.136) v1@56.611,159.253 ; 56.108,159.715 cw(c56.108,158.749) v1@56.791,159.432
JA: U1.2 | length 50.4
  Top Layer w0.254: 44.704,163.642 cw(c46.543,163.642) v1@45.243,164.942 ; 44.704,164.255 cw(c45.93,164.255) v1@45.063,165.122 ; 44.704,164.868 cw(c45.317,164.868) v1@44.883,165.302 ; v1@44.956,164.918 ccw(c44.843,164.758) 44.704,164.897 ; v1(45.085,165.1) 44.996,165.189 44.704,164.897 ; U1.2@46.534,160.776 45.167,160.776 44.704,161.239 44.704,164.897
  Bottom Layer w0.254: 51.968,165.202 51.968,164.516 51.918,164.567 51.892,164.567 ; 59.182,164.643 59.182,165.202 55.829,165.202 53.848,167.183 52.705,167.183 51.892,166.37 51.892,165.202 51.892,164.567 ; 51.892,164.567 51.816,164.49 51.74,164.567 51.892,164.567
  Bottom Layer w0.3: 33.146,165.125 45.466,165.125 ; 44.541,165.125 cw(c44.541,164.556) v1@44.944,164.959 ; 44.663,165.125 ccw(c44.663,165.522) v1@44.944,165.241 ; v1@45.073,165.199 cw(c45.143,164.611) 45.562,165.03 ; v1@45.108,164.901 cw(c45.235,163.827) 45.999,164.592 45.466,165.125 ; v1@45.236,165.231 ccw(c45.466,165.428) 45.466,165.125 ; v1@45.26,165.004 cw(c45.466,164.891) 45.466,165.125 ; 45.955,164.871 46.285,165.202 51.892,165.202 ; 59.182,165.202 64.541,165.202 65.202,164.541
  Bottom Layer w0.4: 32.536,164.516 33.146,165.125
JB: U1.5 | length 41.1
  Top Layer w0.254: U1.5@46.534,158.826 47.828,158.826 48.235,158.42 48.235,157.556 49.174,156.616 v1@49.378,156.616 ; 48.74,157.051 cw(c48.229,156.54) v1@48.951,156.54 ; 48.924,156.867 ccw(c49.174,157.118) v1@49.174,156.763
  Bottom Layer w0.254: 32.588,156.261 32.741,156.413 41.046,156.413 42.266,155.194 43.459,155.194 44.653,156.388 51.74,156.388 52.273,155.854 56.82,155.854 57.5,155.174 58.451,155.174 59.614,156.337 64.795,156.337 ; 48.268,156.388 ccw(c48.268,157.446) v1@49.017,156.698 ; v1@49.332,156.698 ccw(c50.081,157.446) 50.081,156.388 ; 58.673,155.296 58.723,155.346 ; 65.405,155.956 65.43,155.931
  other v1: 49.174,156.54
JC: U1.12 | length 87.1
  Top Layer w0.254: v1@40.508,134.92 cw(c40.127,134.539) 40.665,134.539 cw(c41.204,134.539) v1@40.823,134.92 ; v1(40.665,135.077) 40.665,133.858 44.856,129.667 53.619,129.667 57.734,133.782 v1(57.734,135.153) ; U1.12@53.084,156.225 54.493,156.225 54.635,156.083 54.668,156.083 54.966,155.785 54.966,155.753 55.397,155.321 v1@55.397,152.654 ; v1@55.189,152.888 ccw(c54.686,153.391) 55.397,153.391 ; 55.397,153.146 ccw(c55.762,153.146) v1@55.504,152.888 ; v1@57.577,134.996 cw(c57.196,134.615) 57.734,134.615 cw(c58.273,134.615) v1@57.892,134.996 ; 67.945,130.302 67.945,136.144
  Top Layer w0.3: v1(66.472,136.677) 67.005,136.677 67.462,136.22 ; v1@66.613,136.536 cw(c66.955,136.195) 66.955,136.677 cw(c66.955,137.16) v1@66.613,136.819
  Bottom Layer w0.254: 34.519,136.195 35.103,136.779 40.31,136.779 40.894,136.195 40.894,135.89 40.716,136.068 ; 40.589,136.169 40.665,136.093 ; v1@55.347,152.507 cw(c55.347,151.294) 56.204,152.152 ; v1(55.347,152.73) 55.626,152.73 56.317,152.039 56.317,151.609 58.041,149.885 65.583,149.885 67.742,147.726 67.742,137.947 v1(66.472,136.677) 58.395,136.677 58.09,136.373 ; v1@55.347,152.761 cw(c55.347,152.162) 55.771,152.586 ; v1@66.314,136.52 ccw(c65.933,136.139) 65.933,136.677 ccw(c65.933,137.216) v1@66.314,136.835 ; v1@66.472,136.9 ccw(c66.472,137.439) 66.852,137.058 ccw(c67.233,136.677) v1@66.695,136.677
  Bottom Layer w0.4: v1@57.628,135.259 ccw(c57.372,135.516) 57.734,135.516 ccw(c58.096,135.516) v1@57.84,135.259 ; v1(57.734,135.153) 57.734,136.449
  Bottom Layer w0.7: v1(40.665,135.077) 40.665,136.093